# EAGLE board uln_0.02 (EAGLE 8.0.0)
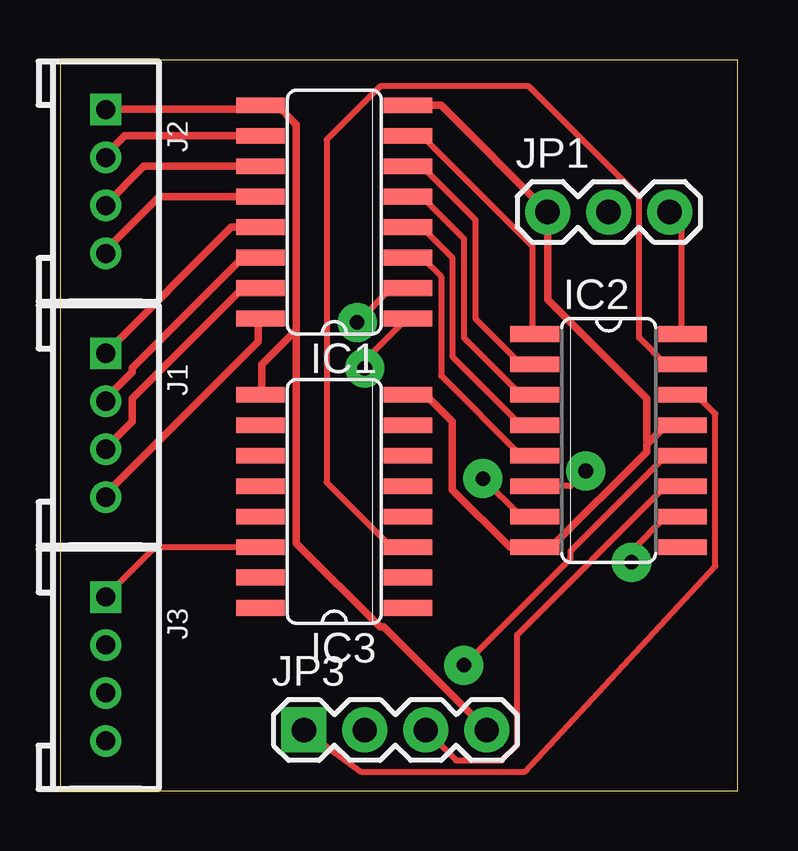
[diagram p0: board, top side]
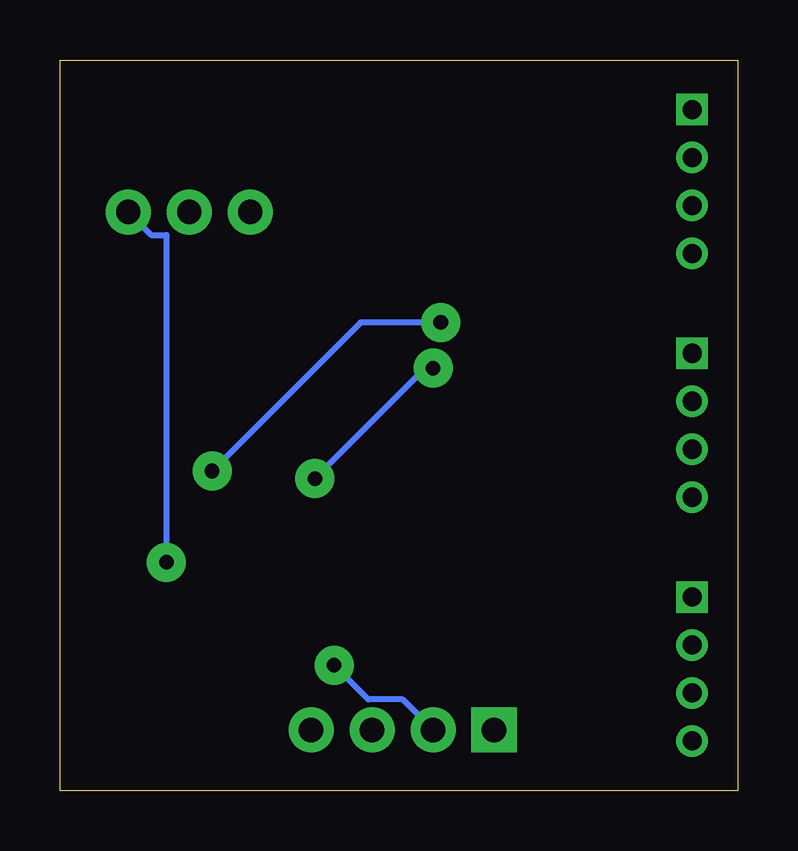
[diagram p1: board, bottom side, seen from below]

Size 28.25 x 30.47 mm. Coordinates in mm from the lower left corner, seen from the top.
Outline: 0,0 28.25,0 28.25,30.47 0,30.47 0,0
Copper layers (1*16): Top 0.035mm / dielectric 1.5mm / Bottom 0.035mm
Design rules "default *": minimum track width 10mil, minimum drill 24mil, track to track 8mil, track to pad 8mil, pad to pad 8mil, via to via 8mil, smd to smd 8mil, copper to edge 40mil, drill to drill 8mil, minimum pad ring 10mil, minimum via ring 1mm, stop-mask expansion 4mil, vias tented up to drill 0mil, thermal gap 10mil
Net classes: 0 POWER: width 0.305 mm, drill 0.2 mm, clearance 0.025 mm; 1 DATA: width 0.203 mm, drill 0.2 mm, clearance 0.025 mm

## Footprints (pad centres in the part's own frame; a part is rotated, then mirrored left to right if it is on the bottom)
SO16 = smd 0.66 x 2.032: 1 -4.445,-3.073; 2 -3.175,-3.073; 3 -1.905,-3.073; 4 -0.635,-3.073; 5 0.635,-3.073; 6 1.905,-3.073; 7 3.175,-3.073; 8 4.445,-3.073; 9 4.445,3.073; 10 3.175,3.073; 11 1.905,3.073; 12 0.635,3.073; 13 -0.635,3.073; 14 -1.905,3.073; 15 -3.175,3.073; 16 -4.445,3.073
HW4-2.0 = drill 0.8 pad 1.27 square: 1 -3,0 | drill 0.8 pad 1.27: 2 -1,0; 3 1,0; 4 3,0
1X03 = drill 1.016 pad 1.88: 1 0,0; 2 2.54,0; 3 5.08,0
1X04 = drill 1.016 pad 1.88 square: 1 0,0 | drill 1.016 pad 1.88: 2 2.54,0; 3 5.08,0; 4 7.62,0

## Placement (x,y rotation side)
IC1  ULN2003AD  [SO16]  11.43,24.13 90 top
IC2  74HC595D  [SO16]  22.86,14.61 270 top
IC3  ULN2003AD  [SO16]  11.43,12.06 90 top
J1  4P-2.0  [HW4-2.0]  1.91,15.24 270 top
J2  4P-2.0  [HW4-2.0]  1.91,25.4 270 top
J3  4P-2.0  [HW4-2.0]  1.91,5.08 270 top
JP1  [1X03]  20.32,24.13 0 top
JP3  [1X04]  10.16,2.54 0 top

## Library data of the parts
IC1 IC3 = uln-udn
IC2 = 74xx-eu
J1-J3 = Seeed-OPL-Connector
JP1 JP3 = SparkFun

## Nets
5V [DATA]: IC2.10 IC2.16 JP1.3
GND: IC1.8 IC2.8 IC2.13 IC3.8 JP1.1
N$1 [DATA]: IC1.7 IC2.1
N$2 [DATA]: IC1.6 IC2.2
N$3 [DATA]: IC1.5 IC2.3
N$4 [DATA]: IC1.4 IC2.4
N$5 [DATA]: IC1.3 IC2.5
N$6 [DATA]: IC1.2 IC2.6
N$7 [DATA]: IC1.1 IC2.7
N$8 [DATA]: IC2.15 IC3.3
N$9: IC1.10 J2.2
N$10: IC1.11 J2.3
N$11: IC1.12 J2.4
N$12: IC1.13 J1.1
N$13: IC1.14 J1.2
N$14: IC1.15 J1.3
N$15: IC1.16 J1.4
N$16 [DATA]: IC3.14 J3.1
N$17 [DATA]: IC2.11 JP3.3
N$18 [DATA]: IC2.12 JP3.2
N$19 [DATA]: IC2.14 JP3.1
VCC: IC1.9 IC3.9 J2.1 JP3.4

## Tracks (layer width: path | path; a pad name or v marks a point on that pad's centre or on a via)
5V  (via drill 0.61)
  Top 0.254: IC2.10 25.24,11.43 23.81,10 v23.81,9.53 | JP1.3 25.88,23.65 25.88,19.05 IC2.16
  Bottom 0.254: v23.81,9.53 23.81,23.18 24.45,23.18 JP1.3
GND
  Top 0.305: IC1.8 15.88,28.57 JP1.1 20.32,20.48 24.45,16.35 24.45,14.61 24.53,14.53 | 24.53,14.53 25.24,15.24 IC2.13 | 24.53,14.53 24.45,14.45 24.45,14.13 20.48,10.16 IC2.8 18.73,10.16 16.35,12.54 16.35,15.4 15.24,16.51 IC3.8
N$1
  Top 0.254: IC1.7 15.08,27.3 19.68,22.7 19.68,19.05 IC2.1
N$2
  Top 0.254: IC2.2 19.21,17.78 17.3,19.68 17.3,23.81 15.08,26.04 IC1.6
N$3
  Top 0.254: IC2.3 19.21,16.51 16.83,18.89 16.83,23.02 15.08,24.77 IC1.5
N$4
  Top 0.254: IC2.4 19.21,15.24 16.35,18.1 16.35,22.23 15.08,23.5 IC1.4
N$5
  Top 0.254: IC2.5 19.21,13.97 15.88,17.3 15.88,21.43 15.08,22.23 IC1.3
N$6  (via drill 0.61)
  Top 0.254: IC2.6 21.27,12.7 v21.91,13.34 | v12.38,19.53 13.81,20.95 IC1.2
  Bottom 0.254: v21.91,13.34 15.72,19.53 v12.38,19.53
N$7  (via drill 0.61)
  Top 0.254: IC2.7 19.21,11.43 v17.62,13.02 | v12.7,17.62 12.7,17.94 14.45,19.68 IC1.1
  Bottom 0.254: v17.62,13.02 13.02,17.62 v12.7,17.62
N$8
  Top 0.254: IC3.3 13.81,10.16 11.11,12.86 11.11,27.15 13.34,29.37 19.53,29.37 24.13,24.77 24.13,18.89 25.24,17.78 IC2.15
N$9
  Top 0.305: IC1.10 2.7,27.3 1.91,26.51 J2.2
N$10
  Top 0.305: IC1.11 3.49,26.04 1.91,24.45 J2.3
N$11
  Top 0.305: IC1.12 4.13,24.77 1.91,22.54 J2.4
N$12
  Top 0.305: IC1.13 7.14,23.5 1.91,18.26 J1.1
N$13
  Top 0.305: IC1.14 7.62,22.23 3.02,17.62 3.02,17.46 1.91,16.35 J1.2
N$14
  Top 0.305: IC1.15 7.62,20.95 3.02,16.35 3.02,15.4 1.91,14.29 J1.3
N$15
  Top 0.305: IC1.16 8.26,19.68 8.26,18.73 1.91,12.38 J1.4
N$16
  Top 0.254: IC3.14 3.97,10.16 1.91,8.1 J3.1
N$17
  Top 0.254: IC2.11 25.24,12.7 19.05,6.51 19.05,1.91 18.41,1.27 16.51,1.27 JP3.3
N$18  (via drill 0.61)
  Top 0.254: IC2.12 25.24,13.97 21.27,10 21.27,9.68 v16.83,5.24
  Bottom 0.254: v16.83,5.24 15.4,3.81 13.97,3.81 JP3.2
N$19
  Top 0.254: IC2.14 26.51,16.51 27.3,15.72 27.3,9.37 19.37,0.79 12.54,0.79 JP3.1
VCC
  Top 0.305: 9.76,19.13 9.84,19.21 9.84,27.78 9.05,28.57 IC1.9 9.05,28.42 1.91,28.42 J2.1 | 9.76,19.13 8.41,17.78 8.41,16.51 IC3.9 | JP3.4 13.49,6.83 13.34,6.83 9.84,10.32 9.84,19.05 9.76,19.13